# EAGLE board Genius (EAGLE 9.7.0)

Size 218.76 x 96.52 mm. Coordinates in mm from the lower left corner, seen from the top.
Outline: 0,0 218.76,0 218.76,96.52 0,96.52 0,0
Copper layers (1*16): Top 0.035mm / dielectric 1.5mm / Bottom 0.035mm
Design rules "default": minimum track width 6mil, minimum drill 0.35mm, track to track 6mil, track to pad 6mil, pad to pad 6mil, via to via 6mil, smd to smd 6mil, copper to edge 40mil, drill to drill 6mil, minimum pad ring 10mil, minimum via ring 8mil, stop-mask expansion 4mil, vias tented up to drill 0mil, thermal gap 10mil

## Footprints (pad centres in the part's own frame; a part is rotated, then mirrored left to right if it is on the bottom)
LEDRD254W60D565H860B_Y = drill 0.981 pad 1.581: 1 -1.27,0; 2 1.27,0
LEDRD254W60D565H860B_B = drill 0.981 pad 1.581: 1 -1.27,0; 2 1.27,0
LEDRD254W60D565H860B = drill 0.981 pad 1.581: 1 -1.27,0; 2 1.27,0
LEDRD254W60D565H860B_G = drill 0.981 pad 1.581: 1 -1.27,0; 2 1.27,0
PIEZO = drill 1 pad 1.6: 1 -3.5,0; 2 3.5,0
RESAD1016W63L850D250B = drill 0.83 pad 1.43: 1 -5.08,0; 2 5.08,0
SWITCH-MOMENTARY-PTH-6.5MM = drill 1.016 pad 1.88: 1 -3.251,2.261; 2 3.251,2.261; 3 -3.251,-2.261; 4 3.251,-2.261
ARDUINO-UNO-R3-SHIELD = drill 1.016 pad 1.88: 3.3V 24.13,-2.54; 5V 24.13,0; A0 24.13,12.7; A1 24.13,15.24; A2 24.13,17.78; A3 24.13,20.32; A4 24.13,22.86; A5 24.13,25.4; AREF -24.13,-13.97; D2 -24.13,20.32; D3 -24.13,17.78; D4 -24.13,15.24; D5 -24.13,12.7; D6 -24.13,10.16; D7 -24.13,7.62; D8 -24.13,3.81; D9 -24.13,1.27; D10 -24.13,-1.27; D11 -24.13,-3.81; D12 -24.13,-6.35; D13 -24.13,-8.89; GND@0 24.13,2.54; GND@1 24.13,5.08; GND@2 -24.13,-11.43; IOREF 24.13,-7.62; NC 24.13,-10.16; RES 24.13,-5.08; RX -24.13,25.4; SCL -24.13,-19.05; SDA -24.13,-16.51; TX -24.13,22.86; VIN 24.13,7.62

## Placement (x,y rotation side)
D1  YELLOW  [LEDRD254W60D565H860B_Y]  167.88,29.27 180 top
D2  BLUE  [LEDRD254W60D565H860B_B]  203.44,29.27 180 top
D3  RED  [LEDRD254W60D565H860B]  203.44,36.89 180 top
D4  GREEN  [LEDRD254W60D565H860B_G]  167.88,36.89 180 top
PIEZO2  PIEZO  [PIEZO]  31.75,13.58 0 top
R1  1k  [RESAD1016W63L850D250B]  174.23,44.51 180 top
R2  1k  [RESAD1016W63L850D250B]  209.79,44.51 0 top
R3  1k  [RESAD1016W63L850D250B]  174.23,24.19 0 top
R4  1k  [RESAD1016W63L850D250B]  209.79,24.19 0 top
S1  SWITCH_MOMENTARY  [SWITCH-MOMENTARY-PTH-6.5MM]  189.47,40.7 90 top
S2  SWITCH_MOMENTARY  [SWITCH-MOMENTARY-PTH-6.5MM]  189.47,25.46 90 top
S3  SWITCH_MOMENTARY  [SWITCH-MOMENTARY-PTH-6.5MM]  153.91,25.46 90 top
S4  SWITCH_MOMENTARY  [SWITCH-MOMENTARY-PTH-6.5MM]  153.91,40.7 90 top
U5  ARDUINO-UNO-R3-SHIELD  [ARDUINO-UNO-R3-SHIELD]  47.88,66.67 270 top

## Library data of the parts
D1 = Tinkercad; CATEGORY: Opto-Electronic; SUB-CATEGORY: LED; VALUE: LED_YELLOW
D2 = Tinkercad; CATEGORY: Opto-Electronic; SUB-CATEGORY: LED; VALUE: LED_BLUE
D3 = Tinkercad; CATEGORY: Opto-Electronic; SUB-CATEGORY: LED; VALUE: LED_RED
D4 = Tinkercad; CATEGORY: Opto-Electronic; SUB-CATEGORY: LED; VALUE: LED_GREEN
PIEZO2 R1-R4 S1-S4 U5 = Tinkercad

## Nets
D1_A: D1.1 R3.1
D2_A: D2.1 R4.1
D3_A: D3.1 R2.1
D4_A: D4.1 R1.2
U5_D2: S4.3 S4.4 U5.D2
U5_D3: R1.1 U5.D3
U5_D4: S1.3 S1.4 U5.D4
U5_D5: R2.2 U5.D5
U5_D6: R4.2 U5.D6
U5_D7: S2.3 S2.4 U5.D7
U5_D8: R3.2 U5.D8
U5_D9: S3.3 S3.4 U5.D9
U5_D10: PIEZO2.1 U5.D10
U5_GND: D1.2 D2.2 D3.2 D4.2 PIEZO2.2 S1.1 S1.2 S2.1 S2.2 S3.1 S3.2 S4.1 S4.2 U5.GND@0 U5.GND@1 U5.GND@2

## Tracks (layer width: path | path; a pad name or v marks a point on that pad's centre or on a via)
D1_A  (1 unrouted)
D2_A  (1 unrouted)
D3_A  (1 unrouted)
D4_A  (1 unrouted)
U5_D2  (2 unrouted)
U5_D3  (1 unrouted)
U5_D4  (2 unrouted)
U5_D5  (1 unrouted)
U5_D6  (1 unrouted)
U5_D7  (2 unrouted)
U5_D8  (1 unrouted)
U5_D9  (2 unrouted)
U5_D10  (1 unrouted)
U5_GND  (15 unrouted)